# Altium PCB PCB1.PcbDoc
Units mil, origin at the board's own origin, x right, y up, seen from the top; angles counter-clockwise.
Board outline 5672.24 x 3835.63 mil, 2 copper layers (Top Layer, Bottom Layer); 62 components, 75 nets, 424 pads, 62 vias.
Unrouted connection lines stored in the file: 72.
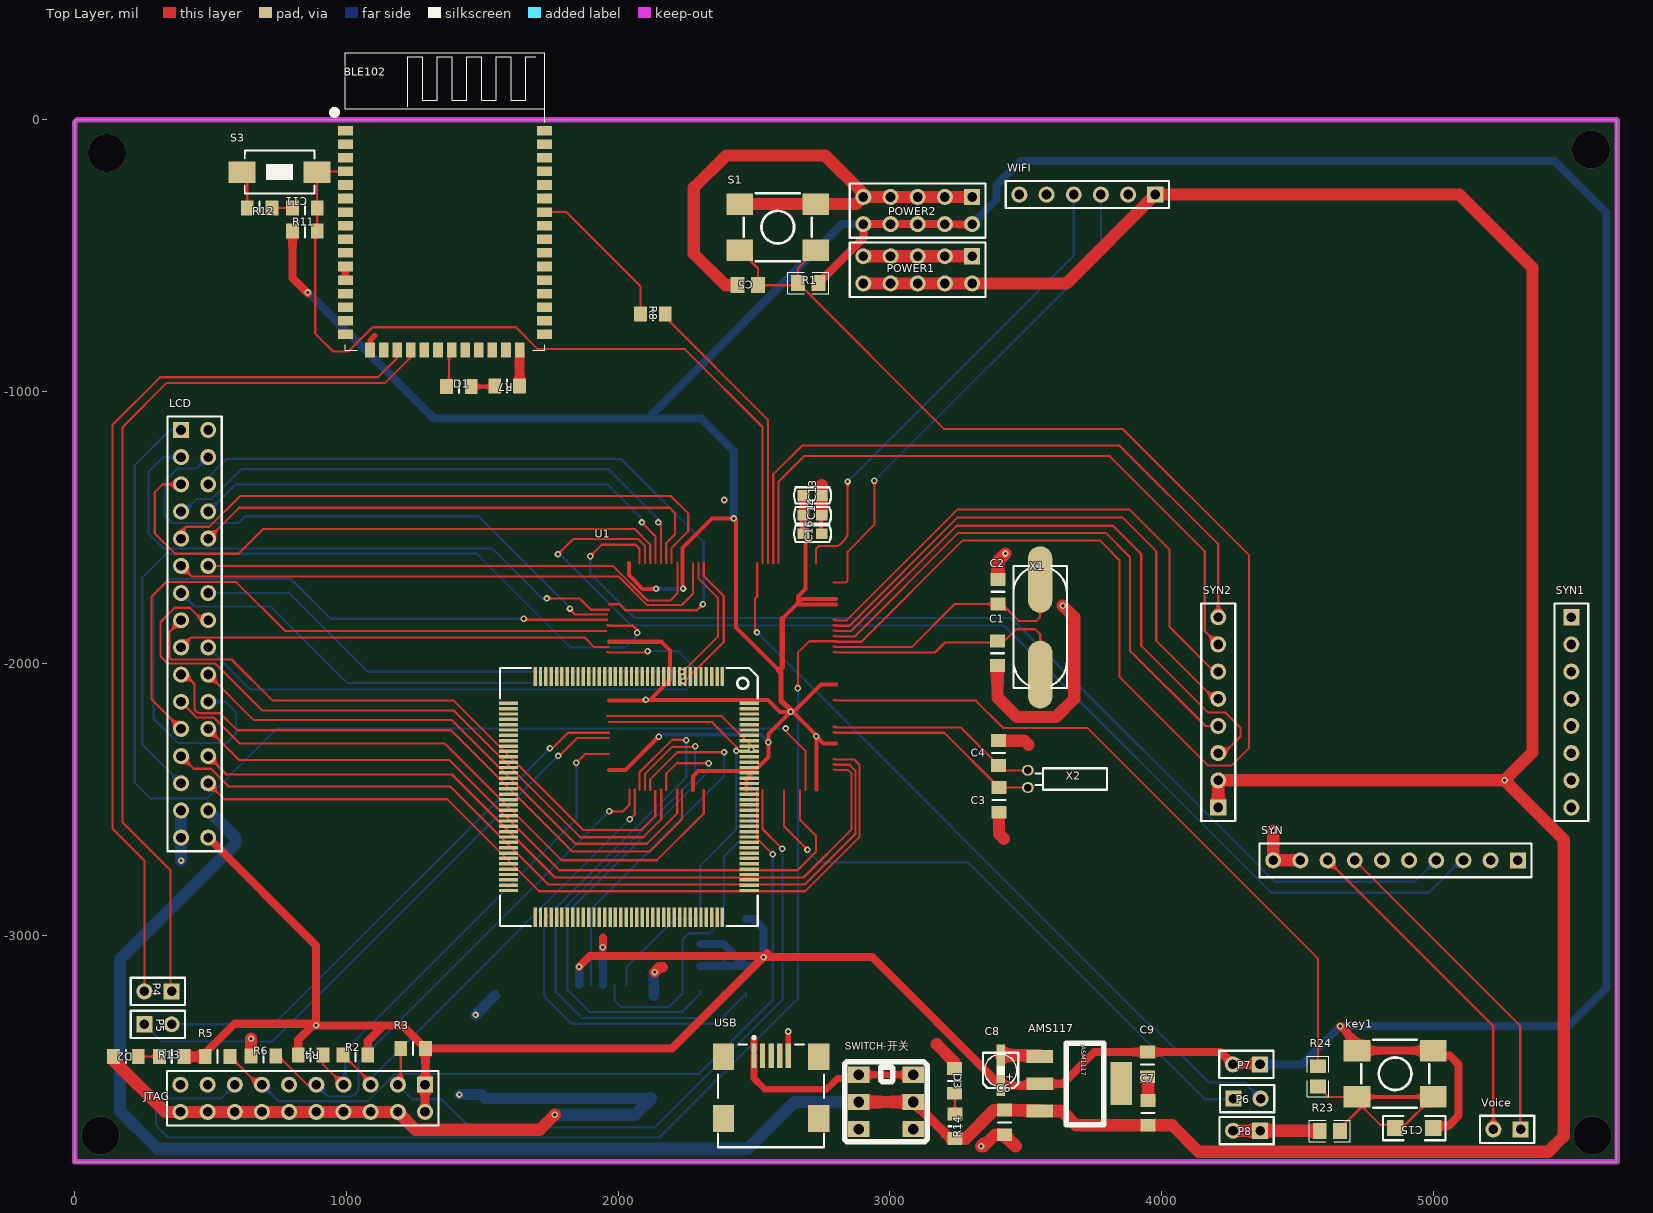
[diagram p0: Top Layer view]
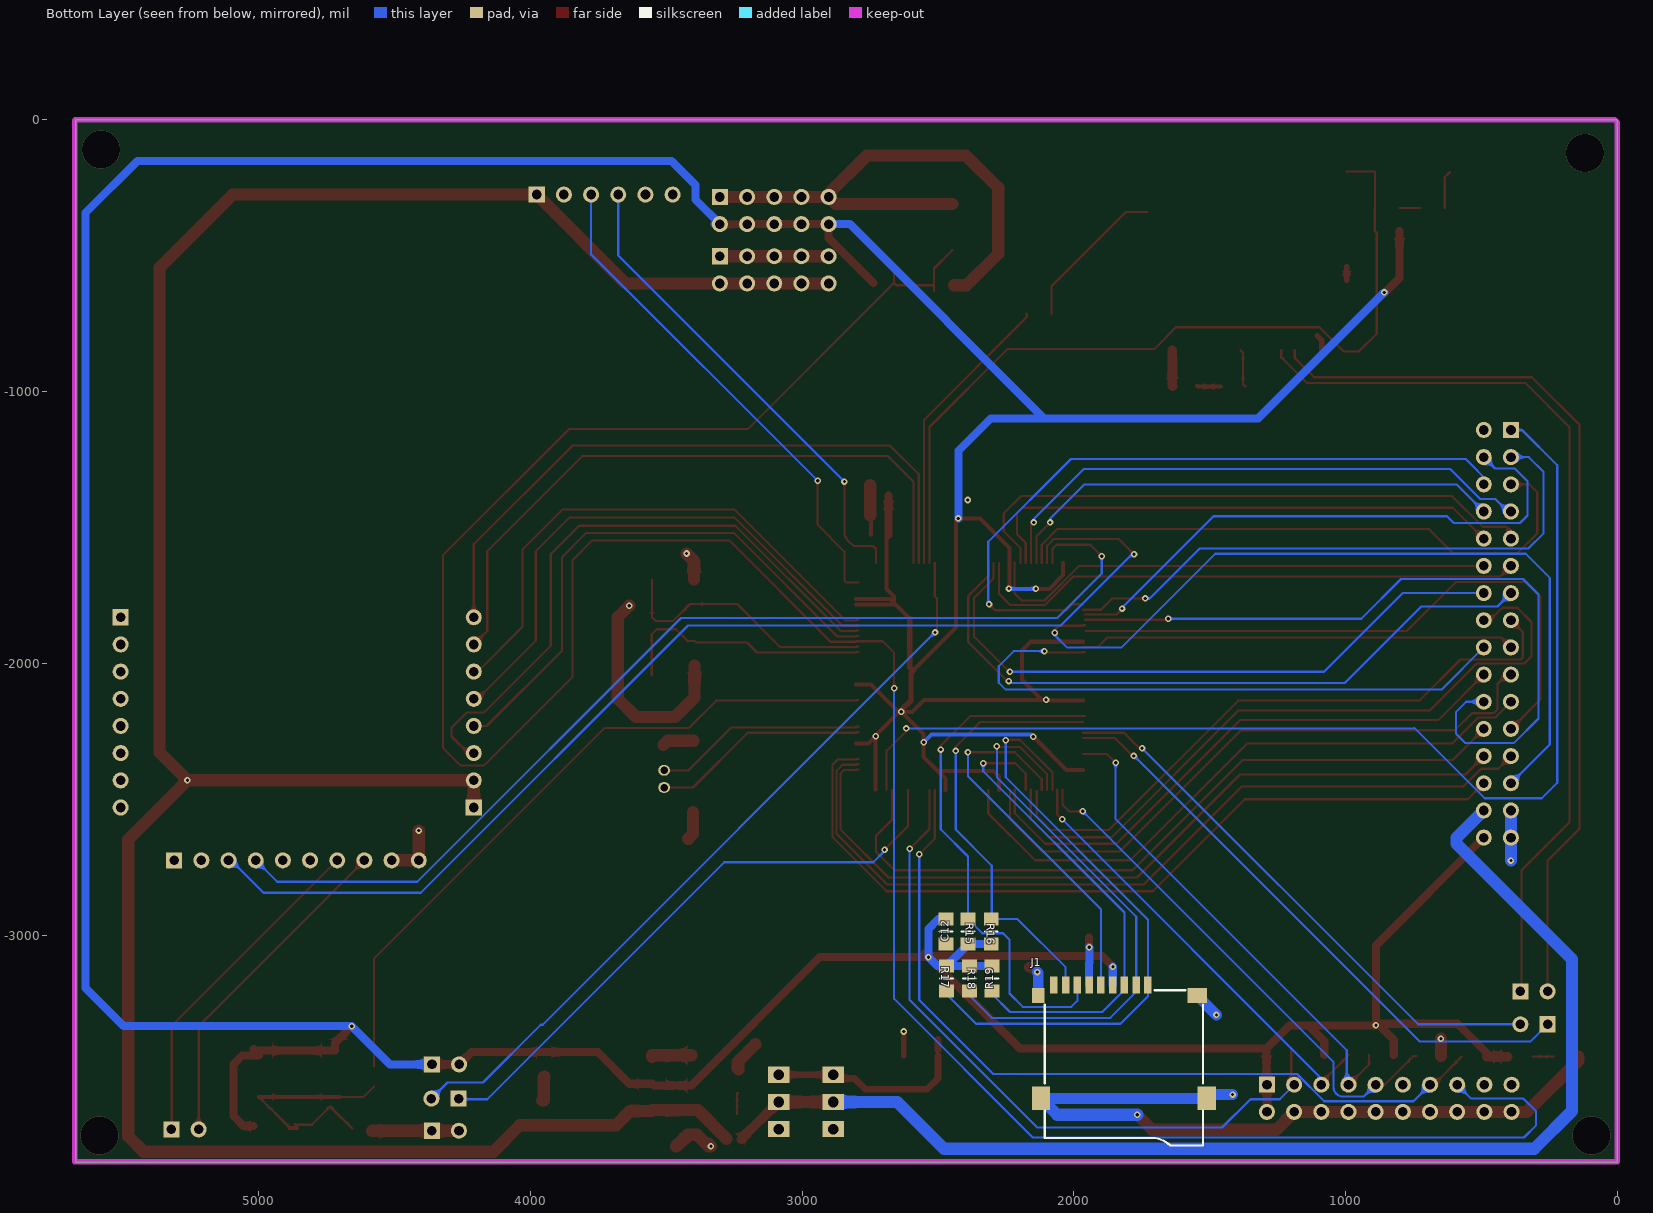
[diagram p1: Bottom Layer view, seen from below]

## Layer stack, top to bottom
Top Solder: solder mask 0.4, Solder Resist, Dk 3.5
Top Layer: signal copper 1.4
Dielectric 1: dielectric 12.6, FR-4, Dk 4.8
Bottom Layer: signal copper 1.4
Bottom Solder: solder mask 0.4, Solder Resist, Dk 3.5

## Board outline
0,-3835.63 5672.24,-3835.63 5672.24,0 0,0

## Design rules (kind name [scope] priority, off if disabled: settings)
Clearance [All] p1 off: gap=6
PolygonConnect [All] p1: connectstyle=Relief reliefconductorwidth=15 reliefentries=4 polygonreliefangle="90 Angle" airgapwidth=10
RoomDefinition Sheet2 [InComponentClass('Sheet2')] p1: confinementstyle=ConfineIn formatcopy=TRUE lockcomponents=FALSE outline -1026.57,-4912.4 973.43,-4912.4 973.43,-3912.4 -1026.57,-3912.4
RoutingVias [All] p1: holewidth=12 width=24 viastyle="Through Hole" minholewidth=12 minwidth=24 maxholewidth=12 maxwidth=24
SilkToSilkClearance [All] p1: silktosilkclearance=0
SilkToSolderMaskClearance [IsPad] p1: minsilkscreentomaskgap=6 clearancetoexposedcopper=TRUE
SolderMaskExpansion [All] p1: expansion=4
Width Width_2 [InNetClass('power')] p1: maxlimit=50 minlimit=15 preferedwidth=15
Width Width_1 [InNetClass('net')] p2: maxlimit=8 minlimit=8 preferedwidth=8
27 further rules are at their usual default settings.

## Components (designator, comment, footprint, x,y, rotation, side; value= is the part's Value field where it differs from the comment)
AMS117 "" ASM117稳压芯片 3551.38,-3446.85 r270 top
BLE102 "" WH-BLE102-V1.1 996.26,-847.24 r0 top
C1 "20P" 0805-有丝印 3395.67,-2007.87 r90 top
C2 "20P" 0805-有丝印 3397.64,-1690.63 r270 top
C3 "10P" 0805-有丝印 3401.57,-2456.69 r270 top
C4 "10P" 0805-有丝印 3399.61,-2375 r90 top
C5 "0.1UF" 0805-2 2477.36,-608.27 r180 top
C6 "104" 0805-有丝印 3421.26,-3734.57 r90 top
C7 "104" 0805-有丝印 3949.8,-3608.27 r270 top
C8 "10u/16v" SMD-EC-F3 3407.48,-3553.15 r90 top
C9 "104" 0805-有丝印 3948.82,-3520.98 r90 top
C11 "100nF" 0805-有丝印 801.85,-323.82 r0 top
C12 "0.1u" 0805-有丝印 2471.46,-3031.81 r90 bottom
C13 "0.1u" C-RAD-0603 2715.55,-1381.89 r0 top
C14 "0.1u" C-RAD-0603 2715.55,-1454.72 r0 top
C15 "104" 1206 4929.13,-3709.65 r0 top
C16 "Cap" C-RAD-0603 2715.55,-1522.64 r0 top
D1 "" 贴片0805-有丝印 1368.78,-981.3 r0 top
D2 "" 贴片0805-有丝印 234.57,-3446.85 r180 top
D3 "" 贴片0805-有丝印 3237.2,-3581.34 r90 top
J1 "SDCARD-M" SDCARD-M 1815.94,-3616.14 r270 bottom
JTAG "Header 10X2" HDR10X2_A1 1289.57,-3550.2 r180 top
key1 "SW-PB4" SW_PB4_A1 4859.25,-3509.78 r180 top
LCD "Header 16X2" HDR16X2 391.73,-1140.95 r270 top
P4 "Header 2" HDR1X2 356.89,-3206.69 r180 top
P5 "Header 2" HDR1X2 256.89,-3327.76 r0 top
P6 "Header 2" HDR1X2 4264.17,-3601.38 r0 top
P7 "Header 2" HDR1X2 4362.2,-3475.39 r180 top
P8 "Header 2" HDR1X2 4362.8,-3719.49 r180 top
POWER1 "Header 5X2" HDR5X2_A1 3302.52,-501.73 r180 top
POWER2 "Header 5X2" HDR5X2_A1 3302.52,-283.62 r180 top
R1 "10K" 0805-1 2699.8,-600.39 r0 top
R2 "10K" 0805-有丝印 988.19,-3440.94 r0 top
R3 "10K" 0805-有丝印 1200.47,-3416.34 r0 top
R4 "10K" 0805-有丝印 913.7,-3440.94 r180 top
R5 "10K" 0805-有丝印 571.85,-3445.87 r180 top
R6 "10K" 0805-有丝印 649.61,-3444.88 r0 top
R7 "1K" 0805-有丝印 1546.26,-979.33 r0 top
R8 "0R" 0805-有丝印 2082.36,-713.58 r0 top
R11 "RES" 0805-有丝印 892.72,-408.46 r180 top
R12 "100R" 0805-有丝印 726.38,-323.82 r180 top
R13 "3K" 0805-有丝印 402.87,-3446.85 r180 top
R14 "5K" 0805-有丝印 3239.17,-3748.35 r90 top
R15 "10K" 0805-有丝印 2389.76,-2940.94 r270 bottom
R16 "10K" 0805-有丝印 2304.13,-2940.94 r270 bottom
R17 "10K" 0805-有丝印 2469.49,-3113.86 r270 bottom
R18 "10K" 0805-有丝印 2384.84,-3113.86 r270 bottom
R19 "10K" 0805-有丝印 2302.17,-3113.86 r270 bottom
R23 "4.7k" 0805-1 4619.09,-3720.47 r0 top
R24 "1k" 0805-1 4575.79,-3519.69 r270 top
S1 "" SW_PB4_A1 2587.6,-394.69 r180 top
S3 "SW-PB" SW_PB2_A1 751.97,-191.93 r270 top
SWITCH-开关 "" switch开关 2885.83,-3513.58 r0 top
SYN "Header 10" DIP20 5310.63,-2724.41 r270 top
SYN1 "Header 8" "DIP16 - duplicate1" 5507.48,-1830.12 r0 top
SYN2 "Header 8" "DIP16 - duplicate1" 4208.27,-2530.12 r180 top
U1 "STM32F103Z" STM32f103zet6 2383.86,-2048.23 r180 top
USB "" USB2.0 2500,-3443.74 r270 top
Voice "Header 2" HDR2X1_A 5320.87,-3714.57 r180 top
WIFI "Header 6" HDR6X1_A 3976.57,-274.61 r180 top
X1 "8M" XTAL-Y贴片晶振 3552.81,-1690.94 r90 top
X2 "32.768KHZ" CRYS-3X8 3515.75,-2393.7 r180 top

## Footprints (in the part's own frame and the unit in brackets; to place one, negate y for a bottom-side part, rotate by r counter-clockwise, add the part's x,y. Pads: shape width x height; smd on the part's side, far side on the other; paste and mask are expansions set on the pad)
0805-1 [mm] "贴片带丝印"
  rect 1.3x1.5 smd: 1(-0.95,0) 2(0.95,0)
  silkscreen extent -1.91,-1.02 1.91,1.02, body extent -1.14,-0.51 1.14,0.51, height 1
0805-2 [mm] "贴片无丝印"
  rect 1.3x1.5 smd: 1(-0.95,0) 2(0.95,0)
0805-有丝印 [mm]
  rect 1.2x1.4 smd: 1(0,0) 2(2.308,0)
  silkscreen extent 1.15,-0.6 1.15,0.6, body extent 0.08,-0.7 2.23,0.7, height 0.7
1206 [mil] "贴片元件"
  rect 60x60 smd: 1(-70,0) 2(70,0)
  silkscreen extent -115,-45 115,45, body extent -75,-35 75,35, height 39
ASM117稳压芯片 [mm]
  rect 1.2x2.5 smd: 1(0,0) 2(2.54,0) 3(5.08,0)
  rect 4x2 smd: 4(2.5,7.62)
  silkscreen extent -1.27,2.46 6.35,5.97
C-RAD-0603 [mm] "贴片电容"
  rect 1.1x1 smd: 1(-0.85,0) 2(0.85,0)
  silkscreen extent -1.73,-0.76 1.73,0.76, body extent -1.14,-0.38 1.14,0.38, height 1
CRYS-3X8 [mm]
  oval 1.1x1 hole 0.7: 1(0.199,-0.003) 2(0.199,1.597)
  silkscreen extent -7.2,-0.2 -0.5,1.8
"DIP16 - duplicate1" [mm]
  rect 1.5x1.5 hole 0.9: 1(0,0)
  round 1.5 hole 0.9: 2(0,-2.54) 3(0,-5.08) 4(0,-7.62) 5(0,-10.16) 6(0,-12.7) 7(0,-15.24) 8(0,-17.78)
  silkscreen extent -1.58,-19.05 1.58,1.27
DIP20 [mm]
  rect 1.5x1.5 hole 0.9: 1(0,0)
  round 1.5 hole 0.9: 2(0,-2.54) 3(0,-5.08) 4(0,-7.62) 5(0,-10.16) 6(0,-12.7) 7(0,-15.24) 8(0,-17.78) 9(0,-20.32) 10(0,-22.86)
  silkscreen extent -1.58,-24.13 1.58,1.27
HDR1X2 [mm] "Connector; Header; 2 Position"
  rect 1.5x1.5 hole 0.9: 1(0,0)
  round 1.5 hole 0.9: 2(2.54,0)
  silkscreen extent -1.27,-1.27 3.81,1.27
HDR2X1_A [mm] "Connector; Header; 2 Position"
  rect 1.5x1.5 hole 0.9: 1(0,0)
  round 1.5 hole 0.9: 2(2.54,0)
  silkscreen extent -1.27,-1.27 3.81,1.27
HDR5X2_A1 [mm] "Connector; Header; 5x2 Position"
  rect 1.5x1.5 hole 0.9: 1(0,0)
  round 1.5 hole 0.9: 2(0,2.54) 3(2.54,0) 4(2.54,2.54) 5(5.08,0) 6(5.08,2.54) 7(7.62,0) 8(7.62,2.54) 9(10.16,0) 10(10.16,2.54)
  silkscreen extent -1.27,-1.27 11.43,3.81
HDR6X1_A [mm] "Connector; Header; 4 Position"
  rect 1.5x1.5 hole 0.9: 1(0,0)
  round 1.5 hole 0.9: 2(2.54,0) 3(5.08,0) 4(7.62,0) 5(10.16,0) 6(12.7,0)
  silkscreen extent -1.27,-1.27 13.97,1.27
HDR10X2_A1 [mm] "Connector; Header; 10x2 Position"
  rect 1.5x1.5 hole 0.9: 1(0,0)
  round 1.5 hole 0.9: 2(0,2.54) 3(2.54,0) 4(2.54,2.54) 5(5.08,0) 6(5.08,2.54) 7(7.62,0) 8(7.62,2.54) 9(10.16,0) 10(10.16,2.54) 11(12.7,0) 12(12.7,2.54) 13(15.24,0) 14(15.24,2.54) 15(17.78,0) 16(17.78,2.54) 17(20.32,0) 18(20.32,2.54) 19(22.86,0) 20(22.86,2.54)
  silkscreen extent -1.27,-1.27 24.13,3.81
HDR16X2 [mm] "Connector; Header; 16x2 Position"
  rect 1.5x1.5 hole 0.9: 1(0,0)
  round 1.5 hole 0.9: 2(0,2.54) 3(2.54,0) 4(2.54,2.54) 5(5.08,0) 6(5.08,2.54) 7(7.62,0) 8(7.62,2.54) 9(10.16,0) 10(10.16,2.54) 11(12.7,0) 12(12.7,2.54) 13(15.24,0) 14(15.24,2.54) 15(17.78,0) 16(17.78,2.54) 17(20.32,0) 18(20.32,2.54) 19(22.86,0) 20(22.86,2.54) 21(25.4,0) 22(25.4,2.54) 23(27.94,0) 24(27.94,2.54) 25(30.48,0) 26(30.48,2.54) 27(33.02,0) 28(33.02,2.54) 29(35.56,0) 30(35.56,2.54) 31(38.1,0) 32(38.1,2.54)
  silkscreen extent -1.27,-1.27 39.37,3.81
SDCARD-M [mm] "TF卡"
  rect 1.6x0.7 smd: 1(-11.008,2.25) 2(-11.008,1.15) 3(-11.008,0.05) 4(-11.008,-1.05) 5(-11.008,-2.15) 6(-11.008,-3.25) 7(-11.008,-4.35) 8(-11.008,-5.45) 9(-11.008,-6.55)
  rect 1.4x1.2 smd: 10(-10,-8.004)
  rect 2.2x1.7 smd: 11(-0.4,-7.75) 13(-0.4,7.75)
  rect 1.4x1.8 smd: 12(-10,6.85)
  silkscreen extent -10.5,-7.4 4,7.4
SMD-EC-F3 [mm]
  rect 2x0.8 smd: 1(0,0) 2(2.835,0)
  silkscreen extent -0.23,-1.65 3.07,1.65
STM32f103zet6 [mm]
  rect 0.318x1.8 smd: 1(0,0) 2(0.5,0) 3(1,0) 4(1.5,0) 5(2,0) 6(2.5,0) 7(3,0) 8(3.5,0) 9(4,0) 10(4.5,0) 11(5,0) 12(5.5,0) 13(6,0) 14(6.5,0) 15(7,0) 16(7.5,0) 17(8,0) 18(8.5,0) 19(9,0) 20(9.5,0) 21(10,0) 22(10.5,0) 23(11,0) 24(11.5,0) 25(12,0) 26(12.5,0) 27(13,0) 28(13.5,0) 29(14,0) 30(14.5,0) 31(15,0) 32(15.5,0) 33(16,0) 34(16.5,0) 35(17,0) 36(17.5,0) 73(17.5,22.5) 74(17,22.5) 75(16.5,22.5) 76(16,22.5) 77(15.5,22.5) 78(15,22.5) 79(14.5,22.5) 80(14,22.5) 81(13.5,22.5) 82(13,22.5) 83(12.5,22.5) 84(12,22.5) 85(11.5,22.5) 86(11,22.5) 87(10.5,22.5) 88(10,22.5) 89(9.5,22.5) 90(9,22.5) 91(8.5,22.5) 92(8,22.5) 93(7.5,22.5) 94(7,22.5) 95(6.5,22.5) 96(6,22.5) 97(5.5,22.5) 98(5,22.5) 99(4.5,22.5) 100(4,22.5) 101(3.5,22.5) 102(3,22.5) 103(2.5,22.5) 104(2,22.5) 105(1.5,22.5) 106(1,22.5) 107(0.5,22.5) 108(0,22.5)
  rect 1.8x0.318 smd: 37(20,2.5) 38(20,3) 39(20,3.5) 40(20,4) 41(20,4.5) 42(20,5) 43(20,5.5) 44(20,6) 45(20,6.5) 46(20,7) 47(20,7.5) 48(20,8) 49(20,8.5) 50(20,9) 51(20,9.5) 52(20,10) 53(20,10.5) 54(20,11) 55(20,11.5) 56(20,12) 57(20,12.5) 58(20,13) 59(20,13.5) 60(20,14) 61(20,14.5) 62(20,15) 63(20,15.5) 64(20,16) 65(20,16.5) 66(20,17) 67(20,17.5) 68(20,18) 69(20,18.5) 70(20,19) 71(20,19.5) 72(20,20) 109(-2.5,20) 110(-2.5,19.5) 111(-2.5,19) 112(-2.5,18.5) 113(-2.5,18) 114(-2.5,17.5) 115(-2.5,17) 116(-2.5,16.5) 117(-2.5,16) 118(-2.5,15.5) 119(-2.5,15) 120(-2.5,14.5) 121(-2.5,14) 122(-2.5,13.5) 123(-2.5,13) 124(-2.5,12.5) 125(-2.5,12) 126(-2.5,11.5) 127(-2.5,11) 128(-2.5,10.5) 129(-2.5,10) 130(-2.5,9.5) 131(-2.5,9) 132(-2.5,8.5) 133(-2.5,8) 134(-2.5,7.5) 135(-2.5,7) 136(-2.5,6.5) 137(-2.5,6) 138(-2.5,5.5) 139(-2.5,5) 140(-2.5,4.5) 141(-2.5,4) 142(-2.5,3.5) 143(-2.5,3) 144(-2.5,2.5)
  silkscreen extent -3.3,-0.8 20.8,23.3
SW_PB2_A1 [mm]
  rect 2x2.5 smd: 1(0,3.556) 2(0,-3.444)
  silkscreen extent -2,-3.19 2,3.31, body extent -2.03,-3.18 2.03,3.3, height 1.2
SW_PB4_A1 [mil]
  rect 98.42x78.74 smd: 1(-140,85) 2(-140,-85) 3(140,-85) 4(140,85)
  silkscreen extent -125,-125 125,125, body extent -125,-125 125,125, height 236
switch开关 [mm]
  rect 2x1.5 hole 1: 1(0,0) 2(0,-2.54) 3(0,-5.08) 4(5.08,-5.08) 5(5.08,-2.54) 6(5.08,0)
  silkscreen extent -1.32,-6.25 6.4,1.22
USB2.0 [mm]
  rect 2.3x0.5 smd: 1(0,0) 2(0,0.8) 3(0,1.6) 4(0,2.4) 5(0,3.2)
  rect 2.5x2 smd: 6(0.1,6.05) 7(5.854,6.05) 8(0.1,-2.85) 9(5.854,-2.85)
  silkscreen extent -1.82,-3.35 8.55,6.55
WH-BLE102-V1.1 [mm]
  rect 1.4x0.9 smd: 1(0,20.52) 2(0,19.25) 3(0,17.98) 4(0,16.71) 5(0,15.44) 6(0,14.17) 7(0,12.9) 8(0,11.63) 9(0,10.36) 10(0,9.09) 11(0,7.82) 12(0,6.55) 13(0,5.28) 14(0,4.01) 15(0,2.74) 16(0,1.47) 29(18.62,1.47) 30(18.62,2.74) 31(18.62,4.01) 32(18.62,5.28) 33(18.62,6.55) 34(18.62,7.82) 35(18.62,9.09) 36(18.62,10.36) 37(18.62,11.63) 38(18.62,12.9) 39(18.62,14.17) 40(18.62,15.44) 41(18.62,16.71) 42(18.62,17.98) 43(18.62,19.25) 44(18.62,20.52)
  rect 0.9x1.4 smd: 17(2.31,0) 18(3.58,0) 19(4.85,0) 20(6.12,0) 21(7.39,0) 22(8.66,0) 23(9.93,0) 24(11.2,0) 25(12.47,0) 26(13.74,0) 27(15.02,0) 28(16.29,0)
  silkscreen extent -1.27,0 18.62,27.81
XTAL-Y贴片晶振 [mil]
  oval 245x90 smd: 1(0,0)
  oval 250x90 smd: 2(-350.39,-0.34)
  silkscreen extent -400,-99 50,98
贴片0805-有丝印 [mm]
  rect 1.2x1.4 smd: 1(0,0) 2(2.308,0)
  silkscreen extent 1.15,-0.6 1.15,0.6, body extent 0.08,-0.7 2.23,0.7, height 0.7

## Part data
AMS117: library part AMS117
BLE102: library part WH-BLE102-V1.1
C1 C2 C3 C4 C6 C7 C9 C11 C12: library part CAP
C5 C13 C14 C15: library part Cap, "无极性电容"
C8: library part CAP-电解电容
C16: "无极性电容"
D1 D2 D3: library part LED
J1: "TF卡槽"
JTAG SYN: "Header, 10-Pin"
key1 S3: "微动开关"
LCD P4 P5 P6 P7 P8 POWER1 POWER2 Voice WIFI: "接插件"
R1 R23 R24: library part Res1, "贴片电阻"
R2 R3 R4 R5 R6 R7 R8 R12 R13 R14 R15 R16 R17 R18 R19: library part RES
S1: library part SW-PB4, "微动开关"
SWITCH-开关: library part SWITCH-开关
SYN1 SYN2: "Header, 8-Pin"
U1: "STM32单片机144引脚"
USB: library part USB
X1 X2: library part XTAL-Y-晶振

## Via types
v1: diameter 24, hole 12, Top Layer to Bottom Layer, 58 vias
v2: diameter 139.76, hole 139.76, Top Layer to Bottom Layer, 4 vias

## Nets (pads, with @x,y where several pads share a name; then routed paths per layer and width w, separated by ;. In a path a pad name is that pad's centre, name@x,y a point inside that pad or via, vN(x,y) a via of type N, cw(c..) or ccw(c..) an arc to the next point about the centre after c; other vN are vias at no path point)
3.3V: AMS117.2 C8.1 C9.2 C12.2 C13.1 C14.1 C15.2 C16.1 J1.4 JTAG.1 JTAG.2 key1.2 key1.3 LCD.32 P7.1 P7.2 POWER2.2 POWER2.4 POWER2.6 POWER2.8 POWER2.10 R1.2 R2.2 R3.2 R4.2 R5.2 R11.2 R13.1 R15.2 R16.2 R17.1 R18.1 R19.1 U1.6 U1.17 U1.32 U1.33 U1.39 U1.52 U1.62 U1.72 U1.84 U1.95 U1.108 U1.121 U1.131 U1.144 | length 24392.5
  Top Layer w15: 1966.54,-2392.72 2026.57,-2392.72 v1(2149.61,-2269.69) ; 1966.54,-2136.81 2099.41,-2136.81 v1(2102.36,-2133.86) 2117.13,-2133.86 ; 1966.54,-1920.28 2159.45,-1920.28 2190.94,-1951.77 2190.94,-2060.04 2117.13,-2133.86 ; 2039.37,-1630.91 2039.37,-1674.21 2090.55,-1725.39 v1(2139.76,-1725.39) ; v1(2239.17,-1724.41) 2236.22,-1721.46 2236.22,-1630.91 2236.22,-1575.79 2345.47,-1466.54 v1(2425.2,-1466.54) 2433.07,-1474.41 2433.07,-1630.91 2433.07,-1868.11 2591.54,-2026.57 ; 2275.59,-2465.55 2275.59,-2416.34 2296.26,-2395.67 2500.98,-2395.67 ; 2472.44,-2465.55 2472.44,-2424.21 2500.98,-2395.67 ; 2604.33,-1834.65 2656.5,-1782.48 ; C16.1@2681.1,-1528.54 C16.1@2682.09,-1527.56 ; C16.1 2688.98,-1529.53 2688.98,-1630.91 2688.98,-1726.38 2662.4,-1752.95 2662.4,-1776.57 ; v1@2723.43,-2257.87 v1@2643.7,-2178.15 ; 2729.33,-2463.58 v1(2729.33,-2267.72) 2755.91,-2294.29 2801.18,-2294.29 ; 2801.18,-2077.76 2746.06,-2077.76 2645.67,-2178.15 v1@2643.7,-2178.15 ; 2801.18,-1782.48 2656.5,-1782.48 ; 2801.18,-1762.8 2676.18,-1762.8 2662.4,-1776.57 ; 2117.13,-2133.86 2551.18,-2133.86 2595.47,-2178.15 v1(2634.84,-2178.15) ; 2500.98,-2395.67 2553.15,-2343.5 2553.15,-2259.84 v1(2634.84,-2178.15) ; v1(2634.84,-2178.15) v1@2643.7,-2178.15 ; 2656.5,-1782.48 2662.4,-1776.57
  Top Layer w20: R5.2@480,-3446.85 R5.2 ; 2604.33,-1834.65 2604.33,-2013.78 2591.54,-2026.57 2599.41,-2034.45 2599.41,-2137.2 2638.92,-2173.73 v1@2643.7,-2178.15
  Top Layer w30: R5.2 480.98,-3433.39 588.58,-3325.79 v1@882.87,-3325.79 ; LCD.32 888.78,-3037.99 v1(888.78,-3331.69) v1@882.87,-3325.79 ; R11.2 801.85,-581.38 859.25,-638.78 v1(858.27,-634.84) ; R4.2 822.83,-3385.83 v1@882.87,-3325.79 ; v1@894.69,-3331.69 1136.81,-3331.69 ; R2.2 1079.06,-3389.45 1136.81,-3331.69 ; JTAG.2 JTAG.1 1291.34,-3548.43 R3.2 ; v1(1856.3,-3116.14) 1895.67,-3076.77 2531.5,-3076.77 v1@2534.94,-3080.22 ; 2548.72,-3066.44 v1@2534.94,-3080.22 ; C16.1@2682.09,-1527.56 C14.1 C13.1 ; R1.2 2902.52,-435.08 POWER2.10 POWER2.8 POWER2.6 POWER2.4 POWER2.2@3297.6,-385.59 ; P7.1 P7.2 4216.93,-3430.12 C9.2 3751.97,-3430.12 3635.24,-3546.85 AMS117.2 3545.08,-3553.15 C8.1 2935.04,-3080.71 v1(2535.43,-3080.71) v1@2534.94,-3080.22 ; v1(4657.48,-3334.65) 4719.25,-3396.42 key1.3 key1.2 ; key1.2@4999.25,-3442.89 5060.08,-3442.89 5092.52,-3475.33 5092.52,-3664.31 5055.12,-3701.71 C15.2@5018.7,-3701.71 ; key1.2@5017.95,-3436.98 key1.2@5017.95,-3418.87 ; 1136.81,-3331.69 1206.69,-3331.69 R3.2 ; R3.2 2198.82,-3416.34 v1@2534.94,-3080.22
  Top Layer w35: R13.1 R5.2@480,-3446.85
  Bottom Layer w15: v1(2139.76,-1725.39) 2238.19,-1725.39 v1(2239.17,-1724.41) ; v1(2149.61,-2269.69) 2158.46,-2260.83 2524.61,-2260.83 2554.13,-2290.35 v1(2552.17,-2290.35)
  Bottom Layer w30: v1(858.27,-634.84) 1321.85,-1098.43 2109.25,-1098.43 ; v1(1856.3,-3116.14) 1857.28,-3117.13 J1.4 ; R19.1 R18.1 ; R16.2 R15.2 2389.76,-3034.13 R17.1 ; R18.1@2389.76,-3108.94 R18.1 ; v1(2425.2,-1466.54) 2425.2,-1217.52 2306.1,-1098.43 2109.25,-1098.43 ; C12.2 2499.02,-2940.94 2535.43,-2977.36 v1(2535.43,-3080.71) 2502.28,-3113.86 R17.1 ; POWER2.10 2824.06,-383.62 2109.25,-1098.43 ; POWER2.2@3322.01,-383.62 POWER2.2 3384.84,-301.3 3384.84,-301.18 3392.72,-293.31 3392.72,-239.17 3481.3,-150.59 5445.87,-150.59 5636.81,-341.54 5636.81,-3194.88 5497.05,-3334.65 v1(4657.48,-3334.65) 4516.73,-3475.39 P7.1 ; R18.1 R17.1
5V: AMS117.3 C6.2 C7.2 LCD.30 POWER1.2 POWER1.4 POWER1.6 POWER1.8 POWER1.10 R14.1 SWITCH-开关.2 SWITCH-开关.5 SYN2.1 SYN2.2 WIFI.1 | length 14109.4
  Top Layer w35: SWITCH-开关.5 3087.01,-3613.58 R14.1@3224.41,-3750.98
  Top Layer w45: SWITCH-开关.2@2889.5,-3610.1 SWITCH-开关.2 SWITCH-开关.5 ; POWER1.10 POWER1.8 POWER1.6 POWER1.4 POWER1.2 3649.45,-601.73 WIFI.1 5095.47,-274.61 5365.16,-544.29 5365.16,-2326.77 v1(5261.81,-2430.12) ; 3277.83,-3748.74 3382.87,-3643.7 C6.2 3551.38,-3643.7 AMS117.3 3633.07,-3646.85 3685.35,-3699.13 C7.2 4038.7,-3699.13 4136.81,-3797.24 5422.24,-3797.24 5479.33,-3740.16 5479.33,-2647.64 v1(5261.81,-2430.12) ; SYN2.1 SYN2.2 v1(5261.81,-2430.12) ; v1@5273.62,-2430.12 v1(5261.81,-2430.12)
  Bottom Layer w45: LCD.30 592.52,-2641.73 592.52,-2663.39 167.32,-3088.58 167.32,-3646.65 306.1,-3785.43 2478.35,-3785.43 2650.2,-3613.58 SWITCH-开关.2
5V_IN: SWITCH-开关.1 SWITCH-开关.6 USB.1 | length 746.8
  Top Layer w25: USB.1 2500,-3526.57 2540.35,-3566.93 2767.56,-3566.93 2806.93,-3527.56 2871.85,-3527.56 SWITCH-开关.1 SWITCH-开关.6 ; USB.1@2500,-3423.23 2500,-3383.86
BD0: SYN2.4 U1.26 | length 2068.2
  Top Layer w8: 2793.31,-1898.62 2801.18,-1898.62 ; 2801.18,-1900.59 2871.06,-1900.59 3251.97,-1519.69 3794.29,-1519.69 3883.86,-1609.25 3883.86,-1952.76 4161.22,-2230.12 SYN2.4
BD1: SYN2.3 U1.27 | length 2302.7
  Top Layer w8: 2793.31,-1878.94 2801.18,-1878.94 ; 2801.18,-1880.91 2858.27,-1880.91 3246.06,-1493.11 3820.87,-1493.11 3925.2,-1597.44 3925.2,-1935.04 4170.28,-2180.12 4233.27,-2180.12 4290.35,-2237.2 4290.35,-2268.7 4228.94,-2330.12 SYN2.3
BK: LCD.27 U1.81 | length 2979
  Top Layer w8: 1958.66,-1859.25 1966.54,-1859.25 ; 1966.54,-1861.22 2051.18,-1861.22 2053.15,-1859.25 2071.85,-1877.95 2070.87,-1878.94 v1(2070.87,-1886.81)
  Bottom Layer w8: LCD.27 249.02,-2298.23 249.02,-1685.04 337.6,-1596.46 1480.31,-1596.46 1825.79,-1941.93 2024.61,-1941.93 2074.8,-1891.73 2070.87,-1887.8 v1(2070.87,-1886.81)
BOOT0: P6.1 U1.138 | length 2206.8
  Top Layer w8: 2610.24,-2465.55 2610.24,-2599.41 v1(2696.85,-2686.02)
  Bottom Layer w8: v1(2696.85,-2686.02) 2696.85,-2689.96 2738.19,-2731.3 3286.42,-2731.3 4158.46,-3603.35 4262.2,-3603.35 P6.1
BOOT1: P6.2 U1.48 | length 2825
  Top Layer w8: v1(2510.83,-1885.83) 2503.94,-1878.94 2503.94,-1760.83 2511.81,-1752.95 2511.81,-1630.91
  Bottom Layer w8: v1(2510.83,-1885.83) 3954.72,-3329.72 3961.61,-3329.72 4174.21,-3542.32 4305.12,-3542.32 P6.2
GND: AMS117.1 BLE102.1 BLE102.11 BLE102.12 BLE102.17 BLE102.28 BLE102.29 BLE102.44 C1.1 C2.1 C3.2 C4.2 C5.2 C6.1 C7.1 C8.2 C9.1 C11.1 C12.1 C13.2 C14.2 C16.2 D2.2 D3.2 J1.6 J1.10 J1.11 J1.12 J1.13 JTAG.4 JTAG.6 JTAG.8 JTAG.10 JTAG.12 JTAG.14 JTAG.16 JTAG.18 JTAG.20 LCD.2 LCD.29 LCD.31 P8.1 P8.2 POWER1.1 POWER1.3 POWER1.5 POWER1.7 POWER1.9 POWER2.1 POWER2.3 POWER2.5 POWER2.7 POWER2.9 R6.1 R7.2 R12.1 R23.1 S1.2 S1.3 SYN.9 SYN.10 U1.16 U1.30 U1.31 U1.38 U1.51 U1.61 U1.71 U1.83 U1.94 U1.107 U1.120 U1.130 U1.143 USB.5 WIFI.2 | length 8803.1
  Top Layer w8: R12.1 C11.1
  Top Layer w15: C16.2 2747.05,-1524.61 2747.05,-1456.69 C14.2
  Top Layer w20: BLE102.12 BLE102.11 ; BLE102.17 1087.2,-811.42 1105.31,-793.31 ; USB.5 v1(2625.98,-3354.33)
  Top Layer w30: v1(1943.9,-3044.29) 1943.9,-3009.84 1944.88,-3008.86
  Top Layer w35: R7.2 1637.6,-978.86 BLE102.28
  Top Layer w40: v1(2134.84,-3135.83) 2152.56,-3118.11 2164.37,-3118.11
  Top Layer w45: D2.2 143.7,-3460.63 333.27,-3650.2 JTAG.20 JTAG.18 JTAG.16 JTAG.14 JTAG.12 JTAG.10 JTAG.8 JTAG.6 JTAG.4 1254.92,-3715.55 1711.61,-3715.55 v1(1766.73,-3660.43) ; R6.1 v1(649.61,-3380.91) ; C5.2 2394.68,-608.27 2278.54,-492.13 2278.54,-250 2397.64,-130.91 2761.81,-130.91 2902.52,-271.61 POWER2.9 ; S1.3 S1.2 2876.46,-309.69 POWER2.9 ; C14.2 C13.2 2749.02,-1344.49 ; POWER1.9 POWER1.7 POWER1.5 POWER1.3 POWER1.1 ; 3172.24,-3402.56 3172.24,-3401.57 3234.25,-3463.58 ; D3.2@3234.25,-3494.41 3234.25,-3463.58 ; D3.2 3237.2,-3466.54 3234.25,-3463.58 ; POWER2.1@3304.09,-285.2 POWER2.1 POWER2.3 POWER2.5 POWER2.7 POWER2.9 ; 3344.49,-3767.72 v1(3335.63,-3776.57) 3344.49,-3776.57 3386.5,-3734.57 C6.1 3463.27,-3776.57 ; C1.1 3395.67,-2125 3467.52,-2196.85 3611.22,-2196.85 3678.15,-2129.92 3678.15,-1829.72 v1(3635.83,-1787.4) ; C2.1 3397.64,-1623.03 v1(3425.2,-1595.47) ; C4.2 3494.76,-2284.13 3509.84,-2299.21 ; C3.2 3401.57,-2626.97 3419.29,-2644.68 ; C8.2 3551.38,-3441.54 AMS117.1 ; C9.1 3950.79,-3522.95 3950.79,-3601.38 3957.68,-3608.27 C7.1 ; P8.2 P8.1 4580.71,-3719.49 R23.1 ; v1(4410.43,-2615.16) 4410.63,-2615.35 SYN.10 SYN.9
  Bottom Layer w30: J1.6 1943.9,-3101.38 1942.91,-3100.39 1942.91,-3045.28 v1(1943.9,-3044.29)
  Bottom Layer w40: v1(1416.34,-3586.61) 1497.05,-3586.61 J1.13 J1.11 ; v1(1475.39,-3293.31) J1.12 ; J1.10 2131.06,-3139.61 v1(2134.84,-3135.83)
  Bottom Layer w45: v1(391.73,-2725.39) LCD.31 LCD.29 ; v1(1766.73,-3660.43) 2061.02,-3660.43 J1.11
KEY1: R24.1 U1.14 | length 2571.6
  Top Layer w8: 2793.31,-2134.84 2801.18,-2134.84 ; 2801.18,-2136.81 3315.94,-2136.81 3416.34,-2237.2 3726.38,-2237.2 4575.79,-3086.61 R24.1
NetBLE102_19: BLE102.19 P4.2 | length 3311.2
  Top Layer w8: P4.2 256.89,-2725.39 139.76,-2608.27 139.76,-1122.05 314.96,-946.85 1116.14,-946.85 1187.2,-875.79 BLE102.19
NetBLE102_20: BLE102.20 P4.1 | length 3344.3
  Top Layer w8: P4.1 352.85,-3202.66 352.85,-2761.32 176.18,-2584.65 176.18,-1130.91 339.57,-967.52 1142.72,-967.52 1237.2,-873.03 BLE102.20
NetBLE102_23: BLE102.23 D1.1 | length 141.7
  Top Layer w8: D1.1 1377.95,-972.13 1377.95,-856.5 BLE102.23
NetBLE102_38: BLE102.38 R8.1 | length 567.6
  Top Layer w8: BLE102.38 1809.84,-339.37 2082.36,-611.89 R8.1
NetC15_1: C15.1 key1.1 key1.4 R23.2 R24.2 | length 900.6
  Top Layer w8: R24.2 4613.48,-3594.78 key1.4@4702.76,-3594.78 ; R23.2@4655.51,-3711.61 key1.4@4733.33,-3633.8 ; key1.4@4734.32,-3627.95 4804.13,-3697.77 4865.04,-3697.77 C15.1@4867.99,-3694.82 ; C15.1@4884.39,-3709.65 key1.1
  Top Layer w15: key1.4@4702.76,-3594.78 key1.4 key1.1 ; C15.1 C15.1@4884.39,-3709.65
NetD1_2: D1.2 R7.1 | length 87.4
  Top Layer w15: D1.2 1544.29,-981.3 R7.1
NetD2_1: D2.1 R13.2 | length 77.4
  Top Layer w8: D2.1 R13.2
NetD3_1: D3.1 R14.2 | length 78.1
  Top Layer w8: D3.1 3239.17,-3581.34 R14.2
NetR12_2: R12.2 S3.2 | length 139.8
  Top Layer w8: S3.2 635.51,-211.06 R12.2
NetSYN_7: SYN.7 Voice.1 | length 1230.7
  Top Layer w8: SYN.7 5319.88,-3333.66 Voice.1@5319.88,-3702.76
NetSYN_8: SYN.8 Voice.2 | length 1231
  Top Layer w8: SYN.8 5220.47,-3334.25 Voice.2@5220.47,-3702.76
NRESET: BLE102.4 C11.2 R11.1 S3.1 U1.47 | length 3066.1
  Top Layer w8: BLE102.4 894.53,-189.37 S3.1 891.97,-323.07 C11.2 R11.1 885.83,-415.35 885.83,-786.42 951.77,-852.36 1006.89,-852.36 1096.46,-762.8 1624.02,-762.8 1704.72,-843.5 2245.08,-843.5 2531.5,-1129.92 2531.5,-1630.91
NRST: C5.1 JTAG.15 R1.1 S1.1 S1.4 U1.25 | length 9961.1
  Top Layer w8: S1.4 2514.76,-546.85 C5.1 ; C5.1@2514.76,-628.94 C5.1 ; v1(2661.42,-2091.54) 2661.42,-1960.63 2703.74,-1918.31 2801.18,-1918.31 ; S1.1 2662.4,-544.88 R1.1 ; 2801.18,-1920.28 2895.67,-1920.28 3268.7,-1547.24 3772.64,-1547.24 3844.49,-1619.09 3844.49,-2049.21 4171.26,-2375.98 4255.91,-2375.98 4321.85,-2310.04 4321.85,-1602.36 3856.3,-1136.81 3198.82,-1136.81 R1.1 ; C5.1 2654.53,-608.27 R1.1
  Bottom Layer w8: JTAG.15 538.39,-3601.38 345.47,-3601.38 299.21,-3647.64 299.21,-3699.8 343.5,-3744.09 2151.57,-3744.09 2661.42,-3234.25 v1(2661.42,-2091.54)
NTRST: JTAG.3 R3.1 U1.134 | length 2615.6
  Top Layer w8: JTAG.3 1200.47,-3539.29 R3.1 ; 2531.5,-2465.55 2531.5,-2609.25 v1(2604.33,-2682.09)
  Bottom Layer w8: JTAG.3 1242.72,-3603.35 1350.39,-3603.35 1454.72,-3707.68 2134.84,-3707.68 2604.33,-3238.19 v1(2604.33,-2682.09)
OSC32_IN: C3.1 U1.8 X2.2 | length 798.2
  Top Layer w8: 2793.31,-2252.95 2801.18,-2252.95 ; 2801.18,-2254.92 3199.8,-2254.92 C3.1 3401.71,-2456.56 X2.2
OSC32_OUT: C4.1 U1.9 X2.1 | length 780.2
  Top Layer w8: 2793.31,-2233.27 2801.18,-2233.27 ; 2801.18,-2235.24 3259.84,-2235.24 C4.1 3418.17,-2393.56 X2.1
OSC_IN: C1.2 U1.23 X1.2 | length 951.7
  Top Layer w8: 2793.31,-1957.68 2801.18,-1957.68 ; 2801.18,-1959.65 3166.34,-1959.65 3202.76,-1923.23 3389.45,-1923.23 C1.2 3421.57,-1917.01 3464.57,-1874.02 3534.45,-1874.02 3553.15,-1892.72 X1.2
OSC_OUT: C2.2 U1.24 X1.1 | length 994.9
  Top Layer w8: 2793.31,-1937.99 2801.18,-1937.99 ; 2801.18,-1939.96 3080.71,-1939.96 3239.17,-1781.5 C2.2 3412.4,-1781.5 3474.41,-1843.5 3538.39,-1843.5 3552.81,-1829.08 X1.1
PC8: J1.7 R15.1 U1.98 | length 1976.6
  Top Layer w8: 1958.66,-2193.9 2381.89,-2193.9 2490.16,-2302.17 v1(2490.16,-2316.93)
  Bottom Layer w8: J1.7 1987.2,-3241.14 2009.84,-3263.78 2187.99,-3263.78 2237.2,-3214.57 2237.2,-3016.73 2260.83,-2993.11 2337.6,-2993.11 R15.1 2389.76,-2710.63 2490.16,-2610.24 v1(2490.16,-2316.93)
PC9: J1.8 R16.1 U1.99 | length 1608.4
  Top Layer w8: 1966.54,-2215.55 2344.49,-2215.55 2435.04,-2306.1 v1(2435.04,-2321.85)
  Bottom Layer w8: J1.8 2030.51,-3118.11 2207.68,-2940.94 R16.1 2302.17,-2938.98 2302.17,-2744.09 2435.04,-2611.22 v1(2435.04,-2321.85)
PC10: J1.1 R17.2 U1.111 | length 2275.1
  Top Layer w8: 2078.74,-2465.55 2078.74,-2400.59 2198.82,-2280.51 v1@2239.17,-2280.51
  Bottom Layer w8: v1(2250.98,-2282.48) 2250.98,-2419.29 1727.36,-2942.91 J1.1 1727.36,-3224.41 1828.74,-3325.79 2360.24,-3325.79 R17.2@2469.49,-3216.54 ; R17.2@2470.47,-3223.43 R17.2@2470.47,-3211.61
PC11: J1.2 R18.2 U1.112 | length 2106.2
  Top Layer w8: 2098.43,-2465.55 2098.43,-2407.48 2198.82,-2307.09 2281.5,-2307.09 v1(2283.46,-2305.12)
  Bottom Layer w8: v1(2283.46,-2305.12) 2283.46,-2419.29 1770.67,-2932.09 J1.2 1770.67,-3208.66 1866.14,-3304.13 2302.17,-3304.13 2384.84,-3221.46 R18.2
PC12: J1.5 U1.113 | length 1410.8
  Top Layer w8: 2118.11,-2465.55 2118.11,-2426.18 2217.52,-2326.77 v1(2389.76,-2326.77)
  Bottom Layer w8: J1.5 1900.59,-2904.53 2389.76,-2415.35 v1(2389.76,-2326.77)
PD0: LCD.15 U1.114 | length 2318.3
  Top Layer w8: LCD.15 348.43,-1884.25 348.43,-1977.36 356.3,-1985.24 577.76,-1985.24 729.33,-2136.81 1395.67,-2136.81 1872.05,-2613.19 2084.65,-2613.19 2136.81,-2561.02 2136.81,-2470.47
PD1: LCD.16 U1.115 | length 2598.4
  Top Layer w8: LCD.16 469.88,-1840.95 424.21,-1795.28 368.11,-1795.28 315.94,-1847.44 315.94,-1973.43 342.52,-2000 517.72,-2000 690.94,-2173.23 1394.69,-2173.23 1861.22,-2639.76 2092.52,-2639.76 2158.46,-2573.82 2158.46,-2463.58
PD4: LCD.20 U1.118 | length 2117.7
  Top Layer w8: LCD.20 659.45,-2208.66 1388.78,-2208.66 1843.5,-2663.39 2105.31,-2663.39 2217.52,-2551.18 2217.52,-2463.58
PD5: LCD.19 U1.119 | length 2324.9
  Top Layer w8: LCD.19 406.1,-2040.95 440.94,-2075.79 440.94,-2160.43 ccw(c463.58,-2160.43) 463.58,-2183.07 535.43,-2183.07 598.43,-2246.06 1384.84,-2246.06 1830.71,-2691.93 2116.14,-2691.93 2235.24,-2572.83 2235.24,-2463.58
PD7: LCD.21 U1.123 | length 2322.9
  Top Layer w8: LCD.21 449.61,-2198.82 511.81,-2198.82 607.28,-2294.29 1362.2,-2294.29 1792.32,-2724.41 2142.72,-2724.41 2314.96,-2552.17 2314.96,-2465.55
PD8: LCD.6 U1.77 | length 2608.7
  Top Layer w8: 1966.54,-1782.48 2004.92,-1782.48 2026.57,-1804.13 2290.35,-1804.13 v1(2312.01,-1782.48)
  Bottom Layer w8: LCD.6@465.55,-1340.55 558.07,-1248.03 2010.83,-1248.03 2314.96,-1552.17 2314.96,-1779.53 v1(2312.01,-1782.48)
PD9: LCD.3 U1.78 | length 2179.5
  Top Layer w8: v1(1737.2,-1760.83) 1859.25,-1760.83 1900.59,-1802.17 1966.54,-1802.17
  Bottom Layer w8: LCD.3 325.98,-1240.95 271.65,-1295.28 271.65,-1520.67 327.76,-1576.77 563.98,-1576.77 1536.42,-1576.77 1720.47,-1760.83 v1(1737.2,-1760.83)
PD10: LCD.4 U1.79 | length 2132
  Top Layer w8: v1(1822.83,-1798.23) 1822.83,-1800.2 1842.52,-1819.88 1958.66,-1819.88
  Bottom Layer w8: LCD.4 450.2,-1282.48 377.95,-1282.48 330.71,-1329.72 330.71,-1455.71 358.27,-1483.27 602.36,-1483.27 626.97,-1458.66 1486.22,-1458.66 1775.59,-1748.03 1776.57,-1748.03 1826.77,-1798.23 v1(1822.83,-1798.23)
PD11: LCD.22 U1.80 | length 2767
  Top Layer w8: v1(1652.56,-1835.63) 1652.56,-1839.57 1958.66,-1839.57
  Bottom Layer w8: LCD.22 556.3,-2140.95 594.49,-2179.13 594.49,-2257.87 559.06,-2293.31 380.91,-2293.31 290.35,-2202.76 290.35,-1746.06 347.44,-1688.98 796.26,-1688.98 942.91,-1835.63 v1(1652.56,-1835.63)
PD13: LCD.23 U1.82 | length 2301.7
  Top Layer w8: LCD.23 283.46,-2132.68 283.46,-1753.94 336.61,-1700.79 595.47,-1700.79 775.59,-1880.91 1956.69,-1880.91
PD14: LCD.17 U1.85 | length 1604.6
  Top Layer w8: LCD.17 428.15,-1904.53 1877.27,-1904.53 1912.7,-1939.96 1966.54,-1939.96
PD15: LCD.18 U1.86 | length 2274.7
  Top Layer w8: 1958.66,-1957.68 1966.54,-1957.68 ; 1966.54,-1959.65 2103.35,-1959.65 v1(2108.27,-1954.72) 2113.19,-1954.72 2110.24,-1957.68 v1@2108.27,-1957.68
  Bottom Layer w8: LCD.18 647.24,-2096.46 2250.98,-2096.46 2276.57,-2070.87 2276.57,-2009.84 2221.46,-1954.72 v1(2108.27,-1954.72)
PE0: LCD.24 U1.141 | length 2731.9
  Top Layer w8: LCD.24 606.1,-2355.32 1378.94,-2355.32 1784.45,-2760.83 2660.43,-2760.83 2728.35,-2692.91 2728.35,-2633.86 2669.29,-2574.8 2669.29,-2465.55
PE1: LCD.1 U1.142 | length 4175.8
  Top Layer w8: v1(2617.13,-2239.17) 2617.13,-2249.02 2688.98,-2320.87 2688.98,-2465.55
  Bottom Layer w8: LCD.1 351.18,-1140.95 221.46,-1270.67 221.46,-2438.98 278.54,-2496.06 488.19,-2496.06 747.05,-2237.2 749.02,-2239.17 v1(2617.13,-2239.17)
PE2: LCD.26 U1.1 | length 2901.8
  Top Layer w8: LCD.26 559.25,-2408.46 1388.78,-2408.46 1767.72,-2787.4 2682.09,-2787.4 2859.25,-2610.24 2859.25,-2405.51 2846.46,-2392.72 2801.18,-2392.72 ; 2793.31,-2390.75 2801.18,-2390.75
PE3: LCD.25 U1.2 | length 3075.4
  Top Layer w8: LCD.25 438.58,-2387.8 501.97,-2387.8 566.93,-2452.76 1381.89,-2452.76 1742.13,-2812.99 2687.99,-2812.99 2873.03,-2627.95 2873.03,-2394.69 2851.38,-2373.03 2801.18,-2373.03 ; 2793.31,-2371.06 2801.18,-2371.06
PE4: LCD.28 U1.3 | length 3013.1
  Top Layer w8: LCD.28 550.79,-2500 1371.06,-2500 1709.65,-2838.58 2688.98,-2838.58 2887.8,-2639.76 2887.8,-2372.05 2869.09,-2353.35 2801.18,-2353.35 ; 2793.31,-2351.38 2801.18,-2351.38
PE7: LCD.13 U1.58 | length 2524.4
  Top Layer w8: v1(2240.16,-2064.96) 2240.16,-2069.88 2388.78,-1921.26 2388.78,-1751.97 2314.96,-1678.15 2314.96,-1630.91
  Bottom Layer w8: LCD.13 441.14,-1790.35 721.46,-1790.35 1002.95,-2071.85 2233.27,-2071.85 v1(2240.16,-2064.96)
PE8: LCD.14 U1.59 | length 2349.2
  Top Layer w8: v1(2235.24,-2030.51) 2238.19,-2030.51 2367.13,-1901.57 2367.13,-1757.87 2295.28,-1686.02 2295.28,-1630.91
  Bottom Layer w8: LCD.14 790.16,-1740.95 1079.72,-2030.51 v1(2235.24,-2030.51)
PE9: LCD.11 U1.60 | length 2095.1
  Top Layer w8: LCD.11 430.91,-1680.12 2001.97,-1680.12 2107.28,-1785.43 2233.27,-1785.43 2275.59,-1743.11 2275.59,-1630.91
  Top Layer w15: LCD.11 LCD.11@413.39,-1640.95
PE10: LCD.12 U1.63 | length 1903.9
  Top Layer w8: LCD.12 1980.51,-1640.95 2108.27,-1768.7 2191.93,-1768.7 2218.5,-1742.13 2218.5,-1628.94
PE11: LCD.9 U1.64 | length 2181.4
  Top Layer w8: LCD.9 391.73,-1514.76 409.45,-1497.05 496.06,-1497.05 609.25,-1383.86 2193.9,-1383.86 2257.87,-1447.83 2257.87,-1513.78 2196.85,-1574.8 2196.85,-1630.91
PE12: LCD.10 U1.65 | length 1970.7
  Top Layer w8: LCD.10 605.51,-1427.17 2189.96,-1427.17 2209.65,-1446.85 2209.65,-1524.61 2177.17,-1557.09 2177.17,-1630.91
PE13: LCD.7 U1.66 | length 2058.9
  Top Layer w8: v1@2149.61,-1481.3 2157.48,-1489.17 2157.48,-1630.91
  Bottom Layer w8: LCD.7 403.54,-1440.95 449.8,-1394.69 504.92,-1394.69 615.16,-1284.45 1963.58,-1284.45 v1@2154.04,-1474.9
  other v1: 2147.64,-1481.3
PE14: LCD.8 U1.67 | length 1894.3
  Top Layer w8: v1(2087.6,-1481.3) 2087.6,-1482.28 2137.8,-1532.48 2137.8,-1630.91
  Top Layer w15: LCD.8 LCD.8@506.5,-1426.18
  Bottom Layer w8: LCD.8 591.14,-1341.54 1961.61,-1341.54 2087.6,-1467.52 v1(2087.6,-1481.3)
PE15: LCD.5 U1.68 | length 2243.8
  Top Layer w8: LCD.5 324.41,-1340.95 295.28,-1370.08 295.28,-1521.65 370.08,-1596.46 603.35,-1596.46 694.88,-1504.92 2060.04,-1504.92 2118.11,-1562.99 2118.11,-1630.91
SDIO_PD2: J1.3 R19.2 U1.116 | length 1841.9
  Top Layer w8: 2177.17,-2465.55 2177.17,-2405.51 2215.55,-2367.13 v1(2333.66,-2367.13)
  Bottom Layer w8: R19.2 2302.17,-3215.55 2235.24,-3282.48 1895.67,-3282.48 1813.98,-3200.79 J1.3 1813.98,-2916.34 2333.66,-2396.65 v1(2333.66,-2367.13)
SYNRB: SYN2.6 U1.29 | length 1998.1
  Top Layer w8: 2793.31,-1839.57 2801.18,-1839.57 ; 2801.18,-1841.54 2841.54,-1841.54 3250,-1433.07 3880.91,-1433.07 4029.53,-1581.69 4029.53,-1866.14 4193.5,-2030.12 SYN2.6
SYNREC: SYN2.7 U1.44 | length 2415.7
  Top Layer w8: 2590.55,-1630.91 2590.55,-1330.71 2684.06,-1237.2 3809.06,-1237.2 4158.46,-1586.61 4158.46,-1880.32 SYN2.7
SYNRESET: SYN2.8 U1.45 | length 2427.4
  Top Layer w8: 2570.87,-1630.91 2570.87,-1304.13 2677.17,-1197.83 3844.49,-1197.83 4208.27,-1561.61 SYN2.8
SYNWIFI: SYN2.5 U1.28 | length 2049.1
  Top Layer w8: 2793.31,-1859.25 2801.18,-1859.25 ; 2801.18,-1861.22 2851.38,-1861.22 3250,-1462.6 3855.31,-1462.6 3980.31,-1587.6 3980.31,-1916.34 4194.09,-2130.12 SYN2.5
TCK: JTAG.9 R6.2 U1.109 | length 1923.3
  Top Layer w8: R6.2 750.98,-3444.88 856.3,-3550.2 JTAG.9 ; v1(1967.52,-2544.29) 2017.72,-2544.29 2041.34,-2520.67 2041.34,-2463.58
  Bottom Layer w8: JTAG.9 932.87,-3593.5 1010.83,-3593.5 ccw(c1010.83,-3560.04) 1044.29,-3560.04 1044.29,-3467.52 v1(1967.52,-2544.29)
TDI: JTAG.5 R2.1 U1.110 | length 1640.2
  Top Layer w8: R2.1 1089.57,-3542.32 JTAG.5 ; v1(2043.31,-2573.82) 2061.02,-2556.1 2061.02,-2463.58
  Bottom Layer w8: JTAG.5 1089.57,-3527.56 v1(2043.31,-2573.82)
TDO: JTAG.13 R5.1 U1.133 | length 3016.3
  Top Layer w8: R5.1 676.18,-3550.2 JTAG.13 ; 2511.81,-2465.55 2511.81,-2644.69 v1(2568.9,-2701.77)
  Bottom Layer w8: JTAG.13 750.59,-3611.22 1078.74,-3611.22 1179.13,-3510.83 2296.26,-3510.83 2568.9,-3238.19 v1(2568.9,-2701.77)
TMS: JTAG.7 R4.1 U1.105 | length 1826.7
  Top Layer w8: R4.1 913.7,-3474.33 JTAG.7 JTAG.7@998.7,-3541.06 ; v1(1846.46,-2365.16) 1877.95,-2333.66 1966.54,-2333.66
  Bottom Layer w8: JTAG.7 996.06,-3543.7 996.06,-3423.23 1846.46,-2572.83 v1(1846.46,-2365.16)
USART1_RX: P5.1 U1.102 | length 2198.9
  Top Layer w8: v1(1779.53,-2340.55) 1783.46,-2340.55 1849.41,-2274.61 1966.54,-2274.61
  Bottom Layer w8: P5.1 320.87,-3391.73 726.38,-3391.73 1777.56,-2340.55 v1(1779.53,-2340.55)
USART1_TX: P5.2 U1.101 | length 2056.8
  Top Layer w8: v1(1749.02,-2312.01) 1758.86,-2312.01 1815.94,-2254.92 1966.54,-2254.92
  Bottom Layer w8: P5.2 733.27,-3327.76 v1@1750.98,-2310.04
USART2_RX: U1.37 WIFI.4 | length 1847.4
  Top Layer w8: 2728.35,-1630.91 2728.35,-1578.74 2739.48,-1567.6 2807.91,-1567.6 ; v1(2844.49,-1330.71) 2844.49,-1523.62 ; 2807.91,-1567.6 ccw(c2773.13,-1501.48) 2844.49,-1523.62 ; 2807.91,-1567.6 ccw(c2773.13,-1501.48) 2844.49,-1523.62
  Bottom Layer w8: v1(2844.49,-1330.71) 3676.57,-498.62 WIFI.4
USART2_TX: U1.36 WIFI.3 | length 1861
  Top Layer w8: 2793.31,-1701.77 2838.58,-1701.77 2844.49,-1695.87 2844.49,-1588.58 2942.91,-1490.16 v1(2942.91,-1327.76)
  Bottom Layer w8: v1(2942.91,-1327.76) 3776.57,-494.09 WIFI.3
USART3_RX: SYN.4 U1.70 | length 3937.1
  Top Layer w8: v1(1897.64,-1605.32) 1939.96,-1562.99 2063.98,-1562.99 2078.74,-1577.76 2078.74,-1630.91
  Bottom Layer w8: v1(1897.64,-1605.32) 1897.64,-1669.29 2061.02,-1832.68 3445.87,-1832.68 4416.34,-2803.15 4931.89,-2803.15 SYN.4
USART3_TX: SYN.3 U1.69 | length 4317.2
  Top Layer w8: v1(1778.54,-1598.43) 1834.65,-1542.32 2073.82,-1542.32 2098.43,-1566.93 2098.43,-1626.97 ; 2098.43,-1630.91 2098.43,-1626.97 ; 2100.39,-1628.94 2098.43,-1626.97
  Bottom Layer w8: v1(1778.54,-1598.43) 1786.42,-1598.43 2048.23,-1860.24 3420.28,-1860.24 4403.54,-2843.5 4982.28,-2843.5 5101.38,-2724.41 SYN.3
WAKE: R8.2 U1.46 | length 1073.9
  Top Layer w8: R8.2 2173.23,-725.39 2551.18,-1103.35 2551.18,-1630.91
pads on no net: AMS117.4 BLE102.2 BLE102.3 BLE102.5 BLE102.6 BLE102.7 BLE102.8 BLE102.9 BLE102.10 BLE102.13 BLE102.14 BLE102.15 BLE102.16 BLE102.18 BLE102.21 BLE102.22 BLE102.24 BLE102.25 BLE102.26 BLE102.27 BLE102.30 BLE102.31 BLE102.32 BLE102.33 BLE102.34 BLE102.35 BLE102.36 BLE102.37 BLE102.39 BLE102.40 BLE102.41 BLE102.42 BLE102.43 J1.9 JTAG.11 JTAG.17 JTAG.19 SWITCH-开关.3 SWITCH-开关.4 SYN1.1 SYN1.2 SYN1.3 SYN1.4 SYN1.5 SYN1.6 SYN1.7 SYN1.8 SYN.1 SYN.2 SYN.5 SYN.6 U1.4 U1.5 U1.7 U1.10 U1.11 U1.12 U1.13 U1.15 U1.18 U1.19 U1.20 U1.21 U1.22 U1.34 U1.35 U1.40 U1.41 U1.42 U1.43 U1.49 U1.50 U1.53 U1.54 U1.55 U1.56 U1.57 U1.73 U1.74 U1.75 U1.76 U1.87 U1.88 U1.89 U1.90 U1.91 U1.92 U1.93 U1.96 U1.97 U1.100 U1.103 U1.104 U1.106 U1.117 U1.122 U1.124 U1.125 U1.126 U1.127 U1.128 U1.129 U1.132 U1.135 U1.136 U1.137 U1.139 U1.140 USB.2 USB.3 USB.4 USB.6 USB.7 USB.8 USB.9 WIFI.5 WIFI.6
copper on no net:
  other v1: 2390.75,-1398.62
  other v2: 95.47,-3737.2 5585.63,-3737.2 119.09,-121.06 5579.72,-109.25

## Keep-outs
Keep-Out Layer:
  lines w20: 0,-3833.66 5677.17,-3833.66 5677.17,-2.95 5674.21,0 8.86,0 0,-8.86 0,-3833.66

## Text inside footprints (layer, text, board x,y; h text height)
AMS117: Top Overlay "ASM1117" at 3697.38,-3406.85 h30 r270
BLE102: Mechanical 6 "Polygon Pour cutout" at 1061.26,292.76 h40
C8: Top Overlay "+" at 3453.72,-3538.94 h30 r90